# Altium PCB PCB.PcbDoc (part 1 of 2)
Units mil, origin at the board's own origin, x right, y up, seen from the top; angles counter-clockwise.
Board outline 6000 x 4000 mil, 2 copper layers (Top Layer, Bottom Layer); 149 components, 246 nets, 514 pads, 0 vias.
Unrouted connection lines stored in the file: 218.
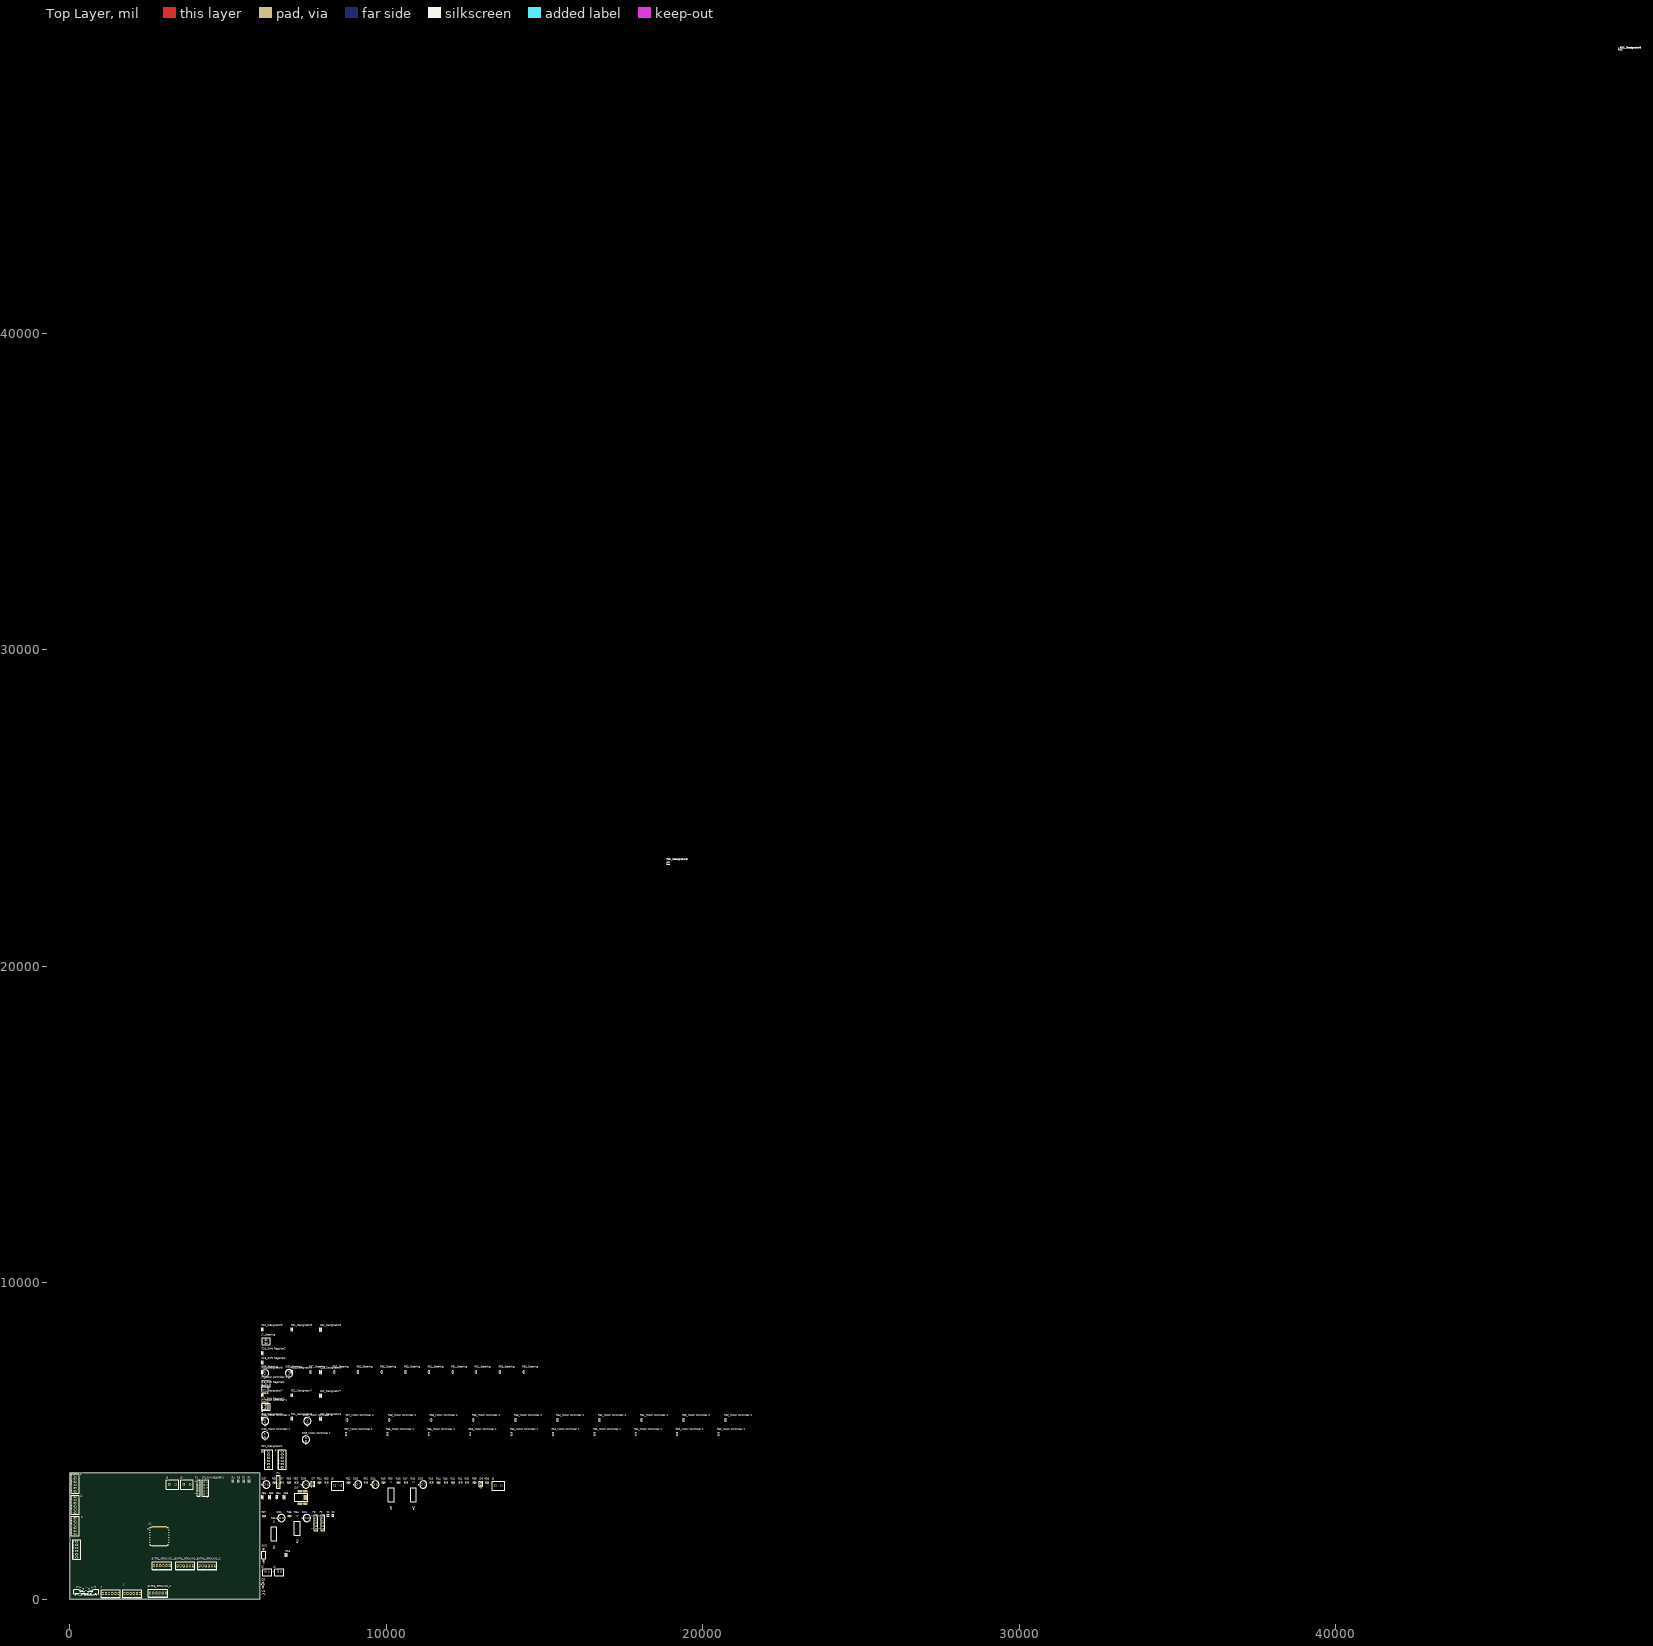
[diagram p0: Top Layer view]
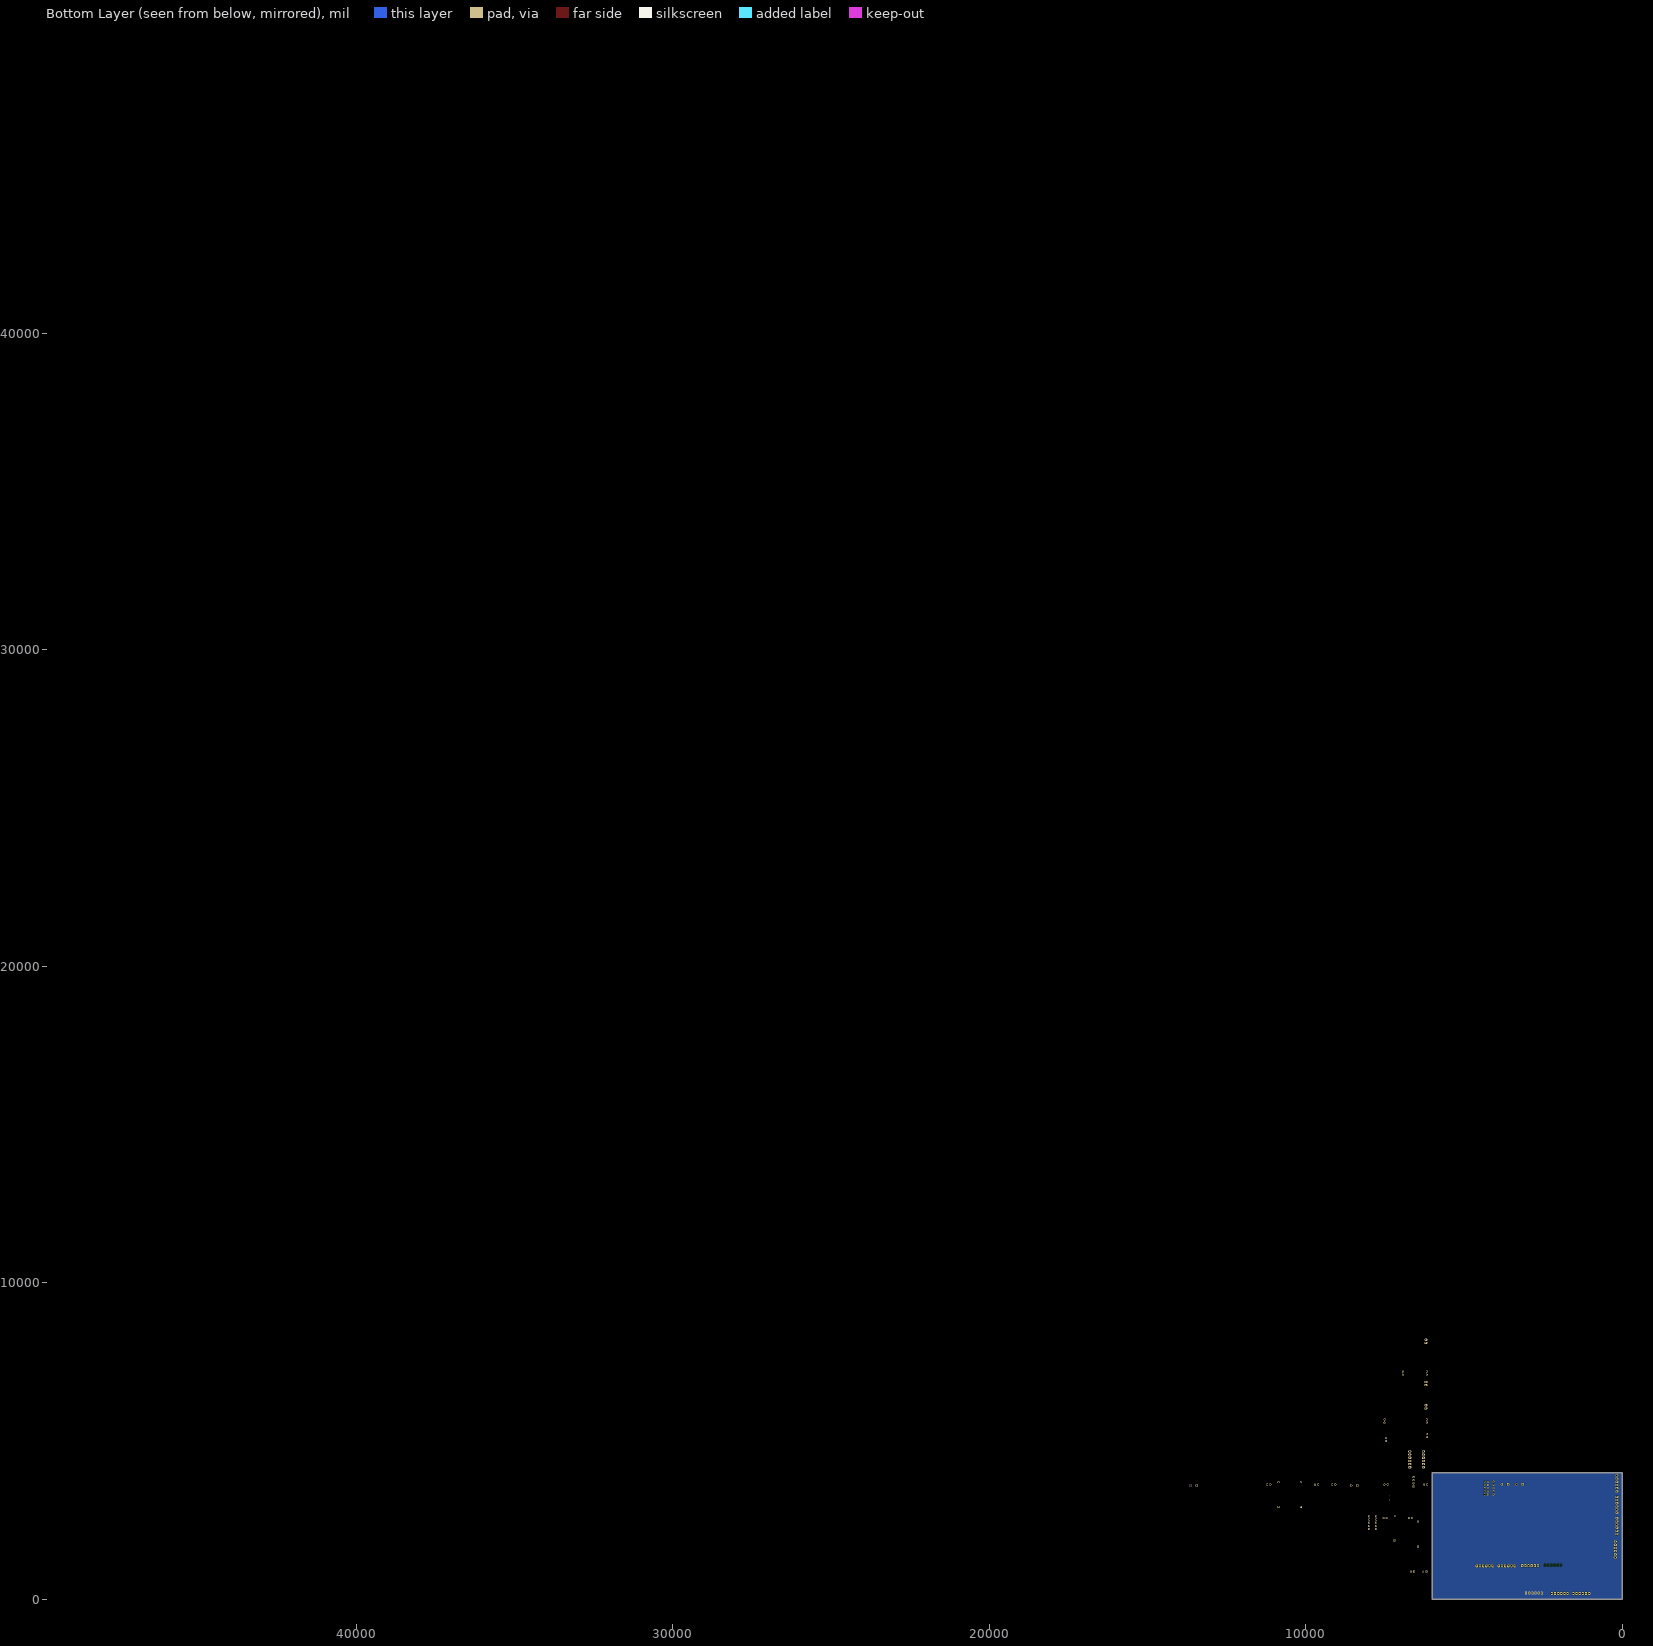
[diagram p1: Bottom Layer view, seen from below]

## Layer stack, top to bottom
Top Solder: solder mask 0.4, Solder Resist, Dk 3.5
Top Layer: signal copper 1.4
Dielectric 1: dielectric 12.6, FR-4, Dk 4.8
Bottom Layer: signal copper 1.4
Bottom Solder: solder mask 0.4, Solder Resist, Dk 3.5

## Board outline
0,0 6000,0 6000,4000 0,4000

## Design rules (kind name [scope] priority, off if disabled: settings)
BoardOutlineClearance [All] p1: gap=7.87 ignorepadtopadclearanceinfootprint=FALSE
Clearance [All] p1: gap=5 ignorepadtopadclearanceinfootprint=FALSE except(9.84: Arc-Hole Track-Hole SMDPad-Hole THPad-Hole Via-Hole Fill-Hole Poly-Hole Region-Hole Text-Hole)
ComponentClearance [All] p1: gap=5 collisioncheckmode=3 verticalgap=5 showdistances=TRUE
DiffPairsRouting [All] p1: maxlimit=10 minlimit=5 mostfreqgap=5 toplayer_minwidth=5 toplayer_maxwidth=1000 toplayer_prefwidth=5 bottomlayer_minwidth=5 bottomlayer_maxwidth=1000 bottomlayer_prefwidth=5 maxuncoupledlength=500
Height [All] p1: minheight=0 maxheight=71497.94 prefheight=500
HoleSize [All] p1: absolutevalues=TRUE maxlimit=248.03 minlimit=11.81 maxpercent=80.000 minpercent=20.000
HoleToHoleClearance [All] p1: gap=9.84 allowstackedmicrovias=FALSE
MinimumAnnularRing [All] p1: minimumring=3
MinimumSolderMaskSliver [All] p1: minsoldermaskwidth=0
PlaneClearance [All] p1: clearance=5
PlaneConnect PlaneConnectPowerPads [InPadClass('PowerPads')] p1: planeconnectstyle=Direct reliefexpansion=20 reliefentries=4 reliefconductorwidth=10 reliefairgap=10
PlaneConnect [All] p2: pad.planeconnectstyle=Relief pad.reliefexpansion=11.81 pad.reliefentries=4 pad.reliefconductorwidth=5 pad.reliefairgap=5 via.planeconnectstyle=Direct via.reliefexpansion=11.81 via.reliefentries=4 via.reliefconductorwidth=5 via.reliefairgap=5
PolygonConnect PolygonConnectPowerPads [All vs (InPadClass('PowerPads'))] p1: connectstyle=Direct reliefconductorwidth=10 reliefentries=4 polygonreliefangle="90 Angle" airgapwidth=10
PolygonConnect [All] p2: thpad.connectstyle=Relief thpad.reliefconductorwidth=5 thpad.reliefentries=4 thpad.polygonreliefangle="90 Angle" thpad.airgapwidth=5 smdpad.connectstyle=Relief smdpad.reliefconductorwidth=5 smdpad.reliefentries=4 smdpad.polygonreliefangle="90 Angle" smdpad.airgapwidth=5 via.connectstyle=Direct via.reliefconductorwidth=5 via.reliefentries=4 via.polygonreliefangle="90 Angle" via.airgapwidth=5
RoomDefinition TOP [InComponentClass('TOP')] p1: confinementstyle=ConfineIn formatcopy=TRUE lockcomponents=FALSE outline -1000,-1000 1000,-1000 1000,0 -1000,0
RoutingVias [All] p1: holewidth=11.81 width=23.62 viastyle="Through Hole" minholewidth=11.81 minwidth=23.62 maxholewidth=23.62 maxwidth=259.84
SilkToSilkClearance [All] p1: silktosilkclearance=0
SilkToSolderMaskClearance [IsPad] p1: minsilkscreentomaskgap=5 clearancetoexposedcopper=TRUE
SolderMaskExpansion [All] p1: expansion=2.95 istentingtop=FALSE
Width [All] p1: maxlimit=1000 minlimit=5 preferedwidth=5 minimp=50.000000 maximp=50.000000 favimp=50.000000
20 further rules are at their usual default settings.

## Classes and differential pairs
component class CONNECTORS: J10 L2 P4 R69 R70
channel class Single_12V: "Motor Controller 1" "Motor Controller 2" Steering
channel class shiftRegister: "Shift Register1" "Shift Register2"
channel class CAN: CAN1 CAN2
channel class 12V_LS: Designator1 Designator2 Designator3 Designator4 Designator5 Designator6 Designator7 Designator8 Designator9
channel class 12_TO_3V3_VOLTAGE_DIVIDER: 1 2 3 4 5 6
channel class 5V_TO_3V_VD: Designator1 Designator2 Designator3 Designator4 Designator5 Designator6
channel class 5V_LS: 5VLS1 5VLS2 5VLS3 5VLS4 5VLS5 5VLS6
component class TOP: EXTRA_GROUND_1 EXTRA_GROUND_2 EXTRA_GROUND_3 EXTRA_GROUND_4 J8 J9 P1 R1 R2 R3 R4 STLINK-HEADER-1
component class Steering: DS8_Steering DS9_Steering J7_Steering R59_Steering R60_Steering R61_Steering R62_Steering R63_Steering R64_Steering R65_Steering R66_Steering R67_Steering R68_Steering
component class "Shift Register2": "C18_Shift Register2" "U3_Shift Register2"
component class "Shift Register1": "C18_Shift Register1" "U3_Shift Register1"
component class POWER: C14 C15 C16 C17 D3 D4 D6 D7 DS3 DS4 DS5 DS6 DS7 J5 J6 R16 R17 R38 R39 R40 R41 R42 R43 R44 R45 R46 R47 R48 R49 R50 R51 R52 R53 R54 R55 R56 R57 R58 VR1
component class "Motor Controller 2": "DS8_Motor Controller 2" "DS9_Motor Controller 2" "J7_Motor Controller 2" "R59_Motor Controller 2" "R60_Motor Controller 2" "R61_Motor Controller 2" "R62_Motor Controller 2" "R63_Motor Controller 2" "R64_Motor Controller 2" "R65_Motor Controller 2" "R66_Motor Controller 2" "R67_Motor Controller 2" "R68_Motor Controller 2"
component class "Motor Controller 1": "DS8_Motor Controller 1" "DS9_Motor Controller 1" "J7_Motor Controller 1" "R59_Motor Controller 1" "R60_Motor Controller 1" "R61_Motor Controller 1" "R62_Motor Controller 1" "R63_Motor Controller 1" "R64_Motor Controller 1" "R65_Motor Controller 1" "R66_Motor Controller 1" "R67_Motor Controller 1" "R68_Motor Controller 1"
component class Microcontroller: 5 6 C1 C2 C3 C4 C5 C41 C42 C43 C44 C45 C46 C47 C48 C49 C50 DS1 DS2 P2 P3 R5 R34 R35 R36 R37 S1 U1 Y1
component class MCU: C6 C7 C8 C9 C10 C11 C12 C13 D1 D2 R6 R7 R8 R9 R10 R11 R12 R13 R14 R15 SW1 U2 Y2
component class LDO: C35 C36 C37 C38 VR2
component class Designator9: C21_Designator9 C22_Designator9 C23_Designator9 IC2_Designator9 R21_Designator9 R22_Designator9
component class Designator8: C21_Designator8 C22_Designator8 C23_Designator8 IC2_Designator8 R21_Designator8 R22_Designator8
component class Designator7: C21_Designator7 C22_Designator7 C23_Designator7 IC2_Designator7 R21_Designator7 R22_Designator7
component class Designator6: C21_Designator6 C22_Designator6 C23_Designator6 IC2_Designator6 R21_Designator6 R22_Designator6
component class Designator5: C21_Designator5 C22_Designator5 C23_Designator5 IC2_Designator5 R21_Designator5 R22_Designator5
component class Designator4: C21_Designator4 C22_Designator4 C23_Designator4 IC2_Designator4 R21_Designator4 R22_Designator4
component class Designator3: C21_Designator3 C22_Designator3 C23_Designator3 IC2_Designator3 R21_Designator3 R22_Designator3
component class Designator2: C21_Designator2 C22_Designator2 C23_Designator2 IC2_Designator2 R21_Designator2 R22_Designator2
component class Designator1: C21_Designator1 C22_Designator1 C23_Designator1 IC2_Designator1 R21_Designator1 R22_Designator1
component class "CAN Connectors": J3 J4
component class CAN2: C39_CAN2 C40_CAN2 IC3_CAN2 R28_CAN2 S2_CAN2
component class CAN1: C39_CAN1 C40_CAN1 IC3_CAN1 R28_CAN1 S2_CAN1
component class Buck: C24 C25 C26 C27 C28 C29 C30 C31 C32 C33 C34 D5 L1 R23 R24 R25 R26 R27 U4
component class "Accelerometer And Gyro": C53 C54 C55 C56 U5
component class "12V Power And Ground": 2 J2
component class "12 Volt Signal Bulkhead": 3
component class 6: C52_6 R32_6 R33_6
component class "5V Power And Ground": 1 J1 R18
component class "5 Volt Signal Bulkhead": 4
component class 5VLS6: C19_5VLS6 C20_5VLS6 IC1_5VLS6 R19_5VLS6 R20_5VLS6
component class 5VLS5: C19_5VLS5 C20_5VLS5 IC1_5VLS5 R19_5VLS5 R20_5VLS5
component class 5VLS4: C19_5VLS4 C20_5VLS4 IC1_5VLS4 R19_5VLS4 R20_5VLS4
component class 5VLS3: C19_5VLS3 C20_5VLS3 IC1_5VLS3 R19_5VLS3 R20_5VLS3
component class 5VLS2: C19_5VLS2 C20_5VLS2 IC1_5VLS2 R19_5VLS2 R20_5VLS2
component class 5VLS1: C19_5VLS1 C20_5VLS1 IC1_5VLS1 R19_5VLS1 R20_5VLS1
component class 5: C52_5 R32_5 R33_5
component class 4: C52_4 R32_4 R33_4
component class 3: C52_3 R32_3 R33_3
component class 2: C52_2 R32_2 R33_2
component class 1: C52_1 R32_1 R33_1
differential pair USB_D: +USB_D_P -USB_D_N

## Components (designator, comment, footprint, x,y, rotation, side; value= is the part's Value field where it differs from the comment)
1 "282834-6" "TE 282834-6" 1970,180 r180 top
2 "282834-6" "TE 282834-6" 1290,180 r180 top
3 "282834-6" "TE 282834-6" 165,2310 r90 top
4 "282834-6" "TE 282834-6" 215,1570 r90 top
5 "282834-6" "TE 282834-6" 6710,4420 r90 top
6 "282834-6" "TE 282834-6" 6280,4420 r90 top
C1 "GRM188R71A225KE15D" FP-GRM188-0_1-e0_2_0_5-MFG 8155,2650 r0 top
C2 "GRM188R71A225KE15D" FP-GRM188-0_1-e0_2_0_5-MFG 8305,2650 r0 top
"C18_Shift Register1" "0.1 µF" "CAP 0603_1608" 6085,7475 r90 top (schematic designator C18)
"C18_Shift Register2" "0.1 µF" "CAP 0603_1608" 6085,7775 r90 top (schematic designator C18)
C22_Designator1 "0.22 µF" "CAP 0603_1608" 48999.5,48999.5 r0 top (schematic designator C22)
C22_Designator2 "0.22 µF" "CAP 0603_1608" 48999.5,48999.5 r0 top (schematic designator C22)
C22_Designator3 "0.22 µF" "CAP 0603_1608" 7930,5705 r90 top (schematic designator C22)
C22_Designator4 "0.22 µF" "CAP 0603_1608" 48999.5,48999.5 r0 top (schematic designator C22)
C22_Designator5 "0.22 µF" "CAP 0603_1608" 48999.5,48999.5 r0 top (schematic designator C22)
C22_Designator6 "0.22 µF" "CAP 0603_1608" 48999.5,48999.5 r0 top (schematic designator C22)
C22_Designator7 "0.22 µF" "CAP 0603_1608" 7930,6440 r90 top (schematic designator C22)
C22_Designator8 "0.22 µF" "CAP 0603_1608" 7930,7175 r90 top (schematic designator C22)
C22_Designator9 "0.22 µF" "CAP 0603_1608" 7930,8520 r90 top (schematic designator C22)
C53 "0.1 µF" "CAP 0603_1608" 6775,3225 r90 top
C54 "10000 pF" "CAP 0603_1608" 6545,3225 r90 top
C55 "0.1 µF" "CAP 0603_1608" 6085,3225 r90 top
C56 "2.2 µF" "CAP 0603_1608" 6315,3225 r90 top
D5 "SS14FL" FP-425AD-MFG 6100,470 r90 top value=60pF
D6 "SMAJ14A-E3/61" VISH-DO-214AC-2_L 12995,3640 r90 top
D7 "SMAJ14A-E3/61" VISH-DO-214AC-2_L 7690,3640 r90 top
DS1 "HLMP-4740" AVAG-HLMP-4740 7490,2565 r0 top
DS2 "HLMP-4740" AVAG-HLMP-4740 6685,2565 r0 top
DS3 "HLMP-4740" AVAG-HLMP-4740 11165,3625 r0 top
DS4 "HLMP-4740" AVAG-HLMP-4740 9655,3625 r0 top
DS5 "HLMP-4740" AVAG-HLMP-4740 9110,3625 r0 top
DS6 "HLMP-4740" AVAG-HLMP-4740 7460,3625 r0 top
DS7 "HLMP-4740" AVAG-HLMP-4740 6210,3625 r0 top
"DS8_Motor Controller 1" "HLMP-4740" AVAG-HLMP-4740 6170,5180 r90 top (schematic designator DS8)
"DS8_Motor Controller 2" "HLMP-4740" AVAG-HLMP-4740 6170,5630 r90 top (schematic designator DS8)
DS8_Steering "HLMP-4740" AVAG-HLMP-4740 6170,7145 r90 top (schematic designator DS8)
"DS9_Motor Controller 1" "HLMP-4740" AVAG-HLMP-4740 7460,5050 r90 top (schematic designator DS9)
"DS9_Motor Controller 2" "HLMP-4740" AVAG-HLMP-4740 7505,5630 r90 top (schematic designator DS9)
DS9_Steering "HLMP-4740" AVAG-HLMP-4740 6925,7145 r90 top (schematic designator DS9)
EXTRA_GROUND_1 "282834-6" "TE 282834-6" 3646.46,1055 r180 top
EXTRA_GROUND_2 "282834-6" "TE 282834-6" 2785,195 r180 top
EXTRA_GROUND_3 "282834-6" "TE 282834-6" 4341.46,1055 r180 top
EXTRA_GROUND_4 "282834-6" "TE 282834-6" 2906.46,1060 r180 top
J1 "282834-6" "TE 282834-6" 165,3660 r90 top
J2 "282834-6" "TE 282834-6" 165,2985 r90 top
J3 "B2B-XH-A(LF)(SN)" FP-B2B-XH-A_LF_SN-MFG 6235,850 r0 top
J4 "B2B-XH-A(LF)(SN)" FP-B2B-XH-A_LF_SN-MFG 6620,850 r0 top
J5 "691137710002" 691137710002 13540,3585 r0 top
J6 "691137710002" 691137710002 8465,3585 r0 top
"J7_Motor Controller 1" "282834-2" "TE 282834-2" 6200,6080 r90 top (schematic designator J7)
"J7_Motor Controller 2" "282834-2" "TE 282834-2" 6200,6815 r90 top (schematic designator J7)
J7_Steering "282834-2" "TE 282834-2" 6200,8150 r90 top (schematic designator J7)
J8 "691137710002" 691137710002 3700,3620 r0 top
J9 "691137710002" 691137710002 3240,3620 r0 top
J10 "67503-1020" MOLX-67503-1020_V 7436.53,3279.61 r0 top
P1 "61300511121" 61300511121 4070,3515 r90 top
P2 "61300511121" 61300511121 7995,2420 r90 top
P3 "61300511121" 61300511121 7775,2420 r90 top
P4 "61300411121" 61300411121 6590,3710 r90 top
R1 "RMCF0603ZT0R00" FP-RMCF0603-MFG 5660,3740 r0 top value=0mΩ
R2 "RMCF0603ZT0R00" FP-RMCF0603-MFG 5490,3740 r0 top value=0mΩ
R3 "RMCF0603ZT0R00" FP-RMCF0603-MFG 5320,3740 r0 top value=0mΩ
R4 "RMCF0603ZT0R00" FP-RMCF0603-MFG 5150,3740 r0 top value=0mΩ
R18 "100 kOhms" "RES 0603_1608" 6840,1400 r90 top
R21_Designator1 "100 kOhms" "RES 0603_1608" 48999.5,48999.5 r0 top (schematic designator R21)
R21_Designator2 "100 kOhms" "RES 0603_1608" 48999.5,48999.5 r0 top (schematic designator R21)
R21_Designator3 "100 kOhms" "RES 0603_1608" 7015,5710 r90 top (schematic designator R21)
R21_Designator4 "100 kOhms" "RES 0603_1608" 48999.5,48999.5 r0 top (schematic designator R21)
R21_Designator5 "100 kOhms" "RES 0603_1608" 48999.5,48999.5 r0 top (schematic designator R21)
R21_Designator6 "100 kOhms" "RES 0603_1608" 48999.5,48999.5 r0 top (schematic designator R21)
R21_Designator7 "100 kOhms" "RES 0603_1608" 7015,6445 r90 top (schematic designator R21)
R21_Designator8 "100 kOhms" "RES 0603_1608" 7015,7180 r90 top (schematic designator R21)
R21_Designator9 "100 kOhms" "RES 0603_1608" 7015,8525 r90 top (schematic designator R21)
R22_Designator1 "10 kOhms" "RES 0603_1608" 48999.5,48999.5 r0 top (schematic designator R22)
R22_Designator2 "10 kOhms" "RES 0603_1608" 48999.5,48999.5 r0 top (schematic designator R22)
R22_Designator3 "10 kOhms" "RES 0603_1608" 6085,5710 r90 top (schematic designator R22)
R22_Designator4 "10 kOhms" "RES 0603_1608" 48999.5,48999.5 r0 top (schematic designator R22)
R22_Designator5 "10 kOhms" "RES 0603_1608" 48999.5,48999.5 r0 top (schematic designator R22)
R22_Designator6 "10 kOhms" "RES 0603_1608" 48999.5,48999.5 r0 top (schematic designator R22)
R22_Designator7 "10 kOhms" "RES 0603_1608" 6085,6445 r90 top (schematic designator R22)
R22_Designator8 "10 kOhms" "RES 0603_1608" 6085,7180 r90 top (schematic designator R22)
R22_Designator9 "10 kOhms" "RES 0603_1608" 6085,8525 r90 top (schematic designator R22)
R31_Designator1 "RMCF0603FT150K" FP-RMCF0603-IPC_B 6090,4690 r90 top (schematic designator R31)
R31_Designator2 "RMCF0603FT150K" FP-RMCF0603-IPC_B 18907.6,23270 r0 top (schematic designator R31)
R31_Designator3 "RMCF0603FT150K" FP-RMCF0603-IPC_B 18907.6,23270 r0 top (schematic designator R31)
R31_Designator4 "RMCF0603FT150K" FP-RMCF0603-IPC_B 18907.6,23270 r0 top (schematic designator R31)
R31_Designator5 "RMCF0603FT150K" FP-RMCF0603-IPC_B 18907.6,23270 r0 top (schematic designator R31)
R31_Designator6 "RMCF0603FT150K" FP-RMCF0603-IPC_B 18907.6,23270 r0 top (schematic designator R31)
R34 "AC01000005000JA100" RES_AC01_VIS 7185,1860 r90 top
R35 "RC0805FR-071KL" RESC2013X60X35ML10T20 6940,2630 r0 top
R36 "AC01000005000JA100" RES_AC01_VIS 6450,1673 r90 top
R37 "RC0805FR-071KL" RESC2013X60X35ML10T20 6135,2630 r0 top
R38 "RC0805FR-071KL" RESC2013X60X35ML10T20 13185,3690 r0 top
R39 "RC0805FR-071KL" RESC2013X60X35ML10T20 12785,3690 r0 top
R40 "RC0805FR-071KL" RESC2013X60X35ML10T20 12555,3690 r0 top
R41 "RC0805FR-071KL" RESC2013X60X35ML10T20 12340,3690 r0 top
R42 "RC0805FR-071KL" RESC2013X60X35ML10T20 12110,3690 r0 top
R43 "RC0805FR-071KL" RESC2013X60X35ML10T20 11420,3690 r0 top
R44 "RC0805FR-071KL" RESC2013X60X35ML10T20 11650,3690 r0 top
R45 "RC0805FR-071KL" RESC2013X60X35ML10T20 11880,3690 r0 top
R46 "RC0805FR-071KL" RESC2013X60X35ML10T20 10385,3690 r0 top
R47 "RC0805FR-071KL" RESC2013X60X35ML10T20 10615,3690 r0 top
R48 "AC01000005000JA100" RES_AC01_VIS 10860,2920 r90 top
R49 "RC0805FR-071KL" RESC2013X60X35ML10T20 9910,3690 r0 top
R50 "AC01000005000JA100" RES_AC01_VIS 10155,2920 r90 top
R51 "RC0805FR-071KL" RESC2013X60X35ML10T20 9365,3690 r0 top
R52 "RC0805FR-071KL" RESC2013X60X35ML10T20 8805,3690 r0 top
R53 "RC0805FR-071KL" RESC2013X60X35ML10T20 8115,3690 r0 top
R54 "RC0805FR-071KL" RESC2013X60X35ML10T20 7885,3690 r0 top
R55 "RC0805FR-071KL" RESC2013X60X35ML10T20 7155,3690 r0 top
R56 "RC0805FR-071KL" RESC2013X60X35ML10T20 6925,3690 r0 top
R57 "RC0805FR-071KL" RESC2013X60X35ML10T20 6695,3690 r0 top
R58 "RC0805FR-071KL" RESC2013X60X35ML10T20 6465,3690 r0 top
"R59_Motor Controller 1" "RC0805FR-071KL" RESC2013X60X35ML10T20 19190,5215 r90 top (schematic designator R59)
"R59_Motor Controller 2" "RC0805FR-071KL" RESC2013X60X35ML10T20 19390,5665 r90 top (schematic designator R59)
R59_Steering "RC0805FR-071KL" RESC2013X60X35ML10T20 13590,7180 r90 top (schematic designator R59)
"R60_Motor Controller 1" "RC0805FR-071KL" RESC2013X60X35ML10T20 20500,5215 r90 top (schematic designator R60)
"R60_Motor Controller 2" "RC0805FR-071KL" RESC2013X60X35ML10T20 20720,5665 r90 top (schematic designator R60)
R60_Steering "RC0805FR-071KL" RESC2013X60X35ML10T20 14340,7180 r90 top (schematic designator R60)
"R61_Motor Controller 1" "RC0805FR-071KL" RESC2013X60X35ML10T20 16580,5215 r90 top (schematic designator R61)
"R61_Motor Controller 2" "RC0805FR-071KL" RESC2013X60X35ML10T20 16740,5665 r90 top (schematic designator R61)
R61_Steering "RC0805FR-071KL" RESC2013X60X35ML10T20 12100,7180 r90 top (schematic designator R61)
"R62_Motor Controller 1" "RC0805FR-071KL" RESC2013X60X35ML10T20 17880,5215 r90 top (schematic designator R62)
"R62_Motor Controller 2" "RC0805FR-071KL" RESC2013X60X35ML10T20 18060,5665 r90 top (schematic designator R62)
R62_Steering "RC0805FR-071KL" RESC2013X60X35ML10T20 12840,7180 r90 top (schematic designator R62)
"R63_Motor Controller 1" "RC0805FR-071KL" RESC2013X60X35ML10T20 13960,5215 r90 top (schematic designator R63)
"R63_Motor Controller 2" "RC0805FR-071KL" RESC2013X60X35ML10T20 14080,5665 r90 top (schematic designator R63)
R63_Steering "RC0805FR-071KL" RESC2013X60X35ML10T20 10605,7180 r90 top (schematic designator R63)
"R64_Motor Controller 1" "RC0805FR-071KL" RESC2013X60X35ML10T20 15270,5215 r90 top (schematic designator R64)
"R64_Motor Controller 2" "RC0805FR-071KL" RESC2013X60X35ML10T20 15410,5665 r90 top (schematic designator R64)
R64_Steering "RC0805FR-071KL" RESC2013X60X35ML10T20 11350,7180 r90 top (schematic designator R64)
"R65_Motor Controller 1" "RC0805FR-071KL" RESC2013X60X35ML10T20 11340,5215 r90 top (schematic designator R65)
"R65_Motor Controller 2" "RC0805FR-071KL" RESC2013X60X35ML10T20 11420,5665 r90 top (schematic designator R65)
R65_Steering "RC0805FR-071KL" RESC2013X60X35ML10T20 9105,7180 r90 top (schematic designator R65)
"R66_Motor Controller 1" "RC0805FR-071KL" RESC2013X60X35ML10T20 12650,5215 r90 top (schematic designator R66)
"R66_Motor Controller 2" "RC0805FR-071KL" RESC2013X60X35ML10T20 12750,5665 r90 top (schematic designator R66)
R66_Steering "RC0805FR-071KL" RESC2013X60X35ML10T20 9855,7180 r90 top (schematic designator R66)
"R67_Motor Controller 1" "RC0805FR-071KL" RESC2013X60X35ML10T20 8725,5215 r90 top (schematic designator R67)
"R67_Motor Controller 2" "RC0805FR-071KL" RESC2013X60X35ML10T20 8765,5665 r90 top (schematic designator R67)
R67_Steering "RC0805FR-071KL" RESC2013X60X35ML10T20 7605,7180 r90 top (schematic designator R67)
"R68_Motor Controller 1" "RC0805FR-071KL" RESC2013X60X35ML10T20 10035,5215 r90 top (schematic designator R68)
"R68_Motor Controller 2" "RC0805FR-071KL" RESC2013X60X35ML10T20 10095,5665 r90 top (schematic designator R68)
R68_Steering "RC0805FR-071KL" RESC2013X60X35ML10T20 8355,7180 r90 top (schematic designator R68)
STLINK-HEADER-1 "826925-5" FP-826925-5-MFG 4290,3510 r90 top
SW1 "FSMSM" TECO-FSMSM-2_V 6125,1395 r90 top
U1 "STM32F446VET6" FP-LQFP100-1L-MFG 2825,1990 r0 top
"U3_Shift Register1" "74HC595PW,118" FP-SOT403-1-MFG 6170,6100 r90 top (schematic designator U3)
"U3_Shift Register2" "74HC595PW,118" FP-SOT403-1-MFG 6170,6630 r90 top (schematic designator U3)
U5 "ICM-20602" INSE-I62-16 6115,130 r0 top

## Footprints (in the part's own frame and the unit in brackets; to place one, negate y for a bottom-side part, rotate by r counter-clockwise, add the part's x,y. Pads: shape width x height; smd on the part's side, far side on the other; paste and mask are expansions set on the pad)
61300411121 [mm] "Pin Header, pitch 2.54 mm, THT, Vertical, single row, 4p"
  rect 1.6x1.6 hole 1.1: 1(-3.81,0)
  round 1.6 hole 1.1: 2(-1.27,0) 3(1.27,0) 4(3.81,0)
  silkscreen extent -5.23,-1.35 5.23,1.35, body extent -5.08,-1.27 5.08,1.27, height 8.57
61300511121 [mm] "Pin Header, pitch 2.54 mm, THT, Vertical, single row, 5p"
  rrect50% 1.6x1.6 hole 1.1: 1(-5.08,0)
  round 1.6 hole 1.1: 2(-2.54,0) 3(0,0) 4(2.54,0) 5(5.08,0)
  silkscreen extent -6.5,-1.35 6.5,1.35, body extent -6.35,-1.27 6.35,1.27, height 8.57
691137710002 [mm] "Horizontal Cable Entry with Pressure Clamp, pitch 5mm, 02p"
  rrect50% 1.95x1.95 hole 1.3: 1(-2.5,0.25)
  round 1.95 hole 1.3: 2(2.5,0.25)
  silkscreen extent -5,-3.75 5,3.75, body extent -5,-3.75 5,3.75, height 11.6
AVAG-HLMP-4740 [mm] "THD, 2-Leads, Dia 5.845mm, Pitch 2.54mm"
  round 1.55 hole 1.05: 1(-1.27,0) 2(1.27,0)
  silkscreen extent -3.92,-2.92 2.92,2.92
"CAP 0603_1608" [mm] "Chip Capacitor, 2-Leads, Body 1.60x0.80mm, IPC Medium Density"
  rect 0.9x1 smd: 1(-0.675,0) 2(0.675,0)
  silkscreen extent -1.4,-0.7 1.4,0.7, body extent -0.8,-0.41 0.8,0.41, height 0.82
FP-425AD-MFG [mm]
  rect 1.34x1.8 smd paste+0 mask+0: 1(-1.43,0) 2(1.43,0)
  silkscreen extent -2.8,-0.97 0.39,0.97, body extent -2.2,-1.07 2.2,1.07, height 0.25
FP-826925-5-MFG [mm]
  rect 1.55x1.55 hole 1 paste-1000 mask+0: 1(-5.08,-1.27)
  round 1.55 hole 1 paste-1000 mask+0: 2(-5.08,1.27) 3(-2.54,-1.27) 4(-2.54,1.27) 5(0,-1.27) 6(0,1.27) 7(2.54,-1.27) 8(2.54,1.27) 9(5.08,-1.27) 10(5.08,1.27)
  silkscreen extent -7.32,-2.6 6.6,2.6, body extent -6.7,-2.7 6.7,2.7, height 0.25
FP-B2B-XH-A_LF_SN-MFG [mm]
  rect 1.55x1.55 hole 1 paste-1000 mask+0: 1(-1.25,0.525)
  round 1.55 hole 1 paste-1000 mask+0: 2(1.25,0.525)
  silkscreen extent -4.5,-2.88 3.7,2.88, body extent -3.8,-2.98 3.8,2.98, height 0.25
FP-GRM188-0_1-e0_2_0_5-MFG [mm]
  rect 0.65x0.7 smd paste+0 mask+0: 1(-0.675,0) 2(0.675,0)
  silkscreen extent -0.85,-0.75 0.85,0.75, body extent -1.1,-0.55 1.1,0.55, height 0.25
FP-LQFP100-1L-MFG [mm]
  rect 1.2x0.3 smd paste+0 mask+0: 1(-7.75,6) 2(-7.75,5.5) 3(-7.75,5) 4(-7.75,4.5) 5(-7.75,4) 6(-7.75,3.5) 7(-7.75,3) 8(-7.75,2.5) 9(-7.75,2) 10(-7.75,1.5) 11(-7.75,1) 12(-7.75,0.5) 13(-7.75,0) 14(-7.75,-0.5) 15(-7.75,-1) 16(-7.75,-1.5) 17(-7.75,-2) 18(-7.75,-2.5) 19(-7.75,-3) 20(-7.75,-3.5) 21(-7.75,-4) 22(-7.75,-4.5) 23(-7.75,-5) 24(-7.75,-5.5) 25(-7.75,-6) 51(7.75,-6) 52(7.75,-5.5) 53(7.75,-5) 54(7.75,-4.5) 55(7.75,-4) 56(7.75,-3.5) 57(7.75,-3) 58(7.75,-2.5) 59(7.75,-2) 60(7.75,-1.5) 61(7.75,-1) 62(7.75,-0.5) 63(7.75,0) 64(7.75,0.5) 65(7.75,1) 66(7.75,1.5) 67(7.75,2) 68(7.75,2.5) 69(7.75,3) 70(7.75,3.5) 71(7.75,4) 72(7.75,4.5) 73(7.75,5) 74(7.75,5.5) 75(7.75,6)
  rect 0.3x1.2 smd paste+0 mask+0: 26(-6,-7.75) 27(-5.5,-7.75) 28(-5,-7.75) 29(-4.5,-7.75) 30(-4,-7.75) 31(-3.5,-7.75) 32(-3,-7.75) 33(-2.5,-7.75) 34(-2,-7.75) 35(-1.5,-7.75) 36(-1,-7.75) 37(-0.5,-7.75) 38(0,-7.75) 39(0.5,-7.75) 40(1,-7.75) 41(1.5,-7.75) 42(2,-7.75) 43(2.5,-7.75) 44(3,-7.75) 45(3.5,-7.75) 46(4,-7.75) 47(4.5,-7.75) 48(5,-7.75) 49(5.5,-7.75) 50(6,-7.75) 76(6,7.75) 77(5.5,7.75) 78(5,7.75) 79(4.5,7.75) 80(4,7.75) 81(3.5,7.75) 82(3,7.75) 83(2.5,7.75) 84(2,7.75) 85(1.5,7.75) 86(1,7.75) 87(0.5,7.75) 88(0,7.75) 89(-0.5,7.75) 90(-1,7.75) 91(-1.5,7.75) 92(-2,7.75) 93(-2.5,7.75) 94(-3,7.75) 95(-3.5,7.75) 96(-4,7.75) 97(-4.5,7.75) 98(-5,7.75) 99(-5.5,7.75) 100(-6,7.75)
  silkscreen extent -9.07,-7.1 7.1,7.1, body extent -8.45,-8.45 8.45,8.45, height 0.25
FP-RMCF0603-IPC_B [mil]
  rect 39.61x37.73 smd paste+0 mask+0: 1(-27.6,0) 2(27.6,0)
  silkscreen extent -47,-35 47,35, body extent -57,-29 57,29, height 10
FP-RMCF0603-MFG [mm]
  rect 0.65x0.9 smd paste+0 mask+0: 1(-0.725,0) 2(0.725,0)
  silkscreen extent -0.85,-0.85 0.85,0.85, body extent -1.15,-0.58 1.15,0.58, height 0.25
FP-SOT403-1-MFG [mm]
  rect 1.35x0.6 smd paste-1000 mask+0: 1(-2.925,2.375) 8(-2.925,-2.375) 9(2.925,-2.375) 16(2.925,2.375)
  rect 1.35x0.4 smd paste-1000 mask+0: 2(-2.925,1.625) 3(-2.925,0.975) 4(-2.925,0.325) 5(-2.925,-0.325) 6(-2.925,-0.975) 7(-2.925,-1.625) 10(2.925,-1.625) 11(2.925,-0.975) 12(2.925,-0.325) 13(2.925,0.325) 14(2.925,0.975) 15(2.925,1.625)
  silkscreen extent -4.32,-2.55 1.88,2.55, body extent -3.72,-2.9 3.72,2.9, height 0.25
INSE-I62-16 [mm] "LGA, 16-Leads, Body 3x3mm, Pitch 0.5mm"
  rect 0.35x0.25 smd: 1(-1.225,1) 2(-1.225,0.5) 3(-1.225,0) 4(-1.225,-0.5) 5(-1.225,-1) 9(1.225,-1) 10(1.225,-0.5) 11(1.225,0) 12(1.225,0.5) 13(1.225,1)
  rect 0.25x0.35 smd: 6(-0.5,-1.225) 7(0,-1.225) 8(0.5,-1.225) 14(0.5,1.225) 15(0,1.225) 16(-0.5,1.225)
  body extent -1.5,-1.5 1.5,1.5, height 0.8
MOLX-67503-1020_V [mm] "Mini USB Connector, SMT, Righer Angle"
  rrect50% 2.8x0.5 smd: 1(0,0) 2(0,-0.8) 3(0,-1.6) 4(0,-2.4) 5(0,-3.2)
  rrect50% 3.5x2.05 smd: 6(0.025,3.325) 8(0.025,-6.525)
  rrect50% 4x2.05 smd: 7(-4.225,3.325) 9(-4.225,-6.525)
  round 0.9 hole 0.9 unplated: X(-2.325,-3.8) Y(-2.325,0.6)
  silkscreen extent -8.25,-4.85 2,1.65, body extent -8.22,-6.56 0.78,3.34, height 3.95
"RES 0603_1608" [mm] "Chip Resistor, 2-Leads, Body 1.60x0.80mm, IPC Medium Density"
  rect 0.85x0.95 smd: 1(-0.65,0) 2(0.65,0)
  silkscreen extent -1.27,-0.7 1.27,0.7, body extent -0.8,-0.4 0.8,0.4, height 0.45
RES_AC01_VIS [mil]
  rect 63x63 / inner round 60 / far side rect 63x63 hole 43 paste-31.5 mask+0: 1(0,0)
  round 63 / inner round 60 / far side round 63 hole 43 paste-31.5 mask+0: 2(777,0)
  silkscreen extent -69,-89 610,90, body extent -16,-84 794,84, height 169
RESC2013X60X35ML10T20 [mm] "Chip Resistor, 2-Leads, Body 2.1x1.35mm, IPC Low Density"
  rect 1.2x1.45 smd: 1(-1,0) 2(1,0)
  silkscreen extent -0.1,-0.63 0.1,0.63, body extent -1.05,-0.68 1.05,0.67, height 0.6
"TE 282834-2" [mm]
  oval 1.75x2.5 hole 1.1: 1(-1.27,0) 2(1.27,0)
  silkscreen extent -2.7,-3.2 2.7,3.2, body extent -2.77,-3.25 2.77,3.25, height 10
"TE 282834-6" [mm]
  oval 1.75x2.5 hole 1.1: 1(-6.35,0) 2(-3.81,0) 3(-1.27,0) 4(1.27,0) 5(3.81,0) 6(6.35,0)
  silkscreen extent -7.78,-3.2 7.78,3.2, body extent -7.85,-3.25 7.85,3.25, height 10
TECO-FSMSM-2_V [mm] "SMD, 2-Leads, Body 6x3.5mm, Pitch 9.19mm"
  rect 2.2x1.6 smd: 1(-4.595,0)
  rect 2.18x1.6 smd: 2(4.595,0)
  silkscreen extent -6.37,-1.75 3,1.75, body extent -4.98,-1.75 4.98,1.75, height 4.4
VISH-DO-214AC-2_L [mm] "DO-214AC, 2-Leads, Body 4.5x2.79mm, IPC High Density"
  rect 2.05x1.45 smd: 1(-1.425,0) 2(1.425,0)
  silkscreen extent -3.12,-1.4 2.25,1.4, body extent -2.25,-1.4 2.25,1.4, height 2.29

## Part data
1 2 3 4 5 6 EXTRA_GROUND_1 EXTRA_GROUND_2 EXTRA_GROUND_3 EXTRA_GROUND_4 J1 J2: "TERM BLK 6P SIDE ENT 2.54MM PCB", Color=Green, Current=10A, Manufacturer="TE Connectivity AMP Connectors", Supplier Part Number 1=A98337-ND, Voltage=150V, ComponentLink1Description=Datasheet, ComponentLink1URL=https://www.te.com/commerce/DocumentDelivery/DDEController?Action=srchrtrv&DocNm=282834&DocType=Customer+Drawing&DocLang=English, ComponentLink2Description="DigiKey Link", ComponentLink2URL=http://digikey.com/product-detail/en/te-connectivity-amp-connectors/282834-6/A98337-ND/1153267, LastUpdated="2020-01-15 4:16:31 AM", Lifecycle Status=Active, Mating Orientation="Horizontal with Board", Minimum Order=1, Mounting Type="Through Hole", Number of Levels=1, Packaging=Bulk, Part Number=282834-6, Part Status=Active, Pitch="0.100\" (2.54mm)", Positions Per Level=6, Price=4.72, Series=Buchanan, Supplier 1=DigiKey, Wire Gauge="16-30 AWG", Wire Termination="Screw - Rising Cage Clamp"
C1 C2: library part CMP-2006-02836-2, "Chip Multilayer Ceramic Capacitors for General Purpose, 0603, 2.2uF, X7R, 15%, 10%, 10V", Capacitance=2.2uF, Case Code (Imperial)=0603, Case Code (Metric)=1608, Dielectric=X7R, Max Operating Temperature=125°C, Min Operating Temperature=-55°C, Package Quantity=1, Tolerance=10%, Voltage=10V, Case/Package=0603, Depth=0.8mm, Height=0.8mm, Lead Free="Lead Free", Length=1.6mm, Material=Ceramic, Mount="Surface Mount", Number of Pins=2, Packaging="Cut Tape", REACH SVHC="No SVHC", Termination=SMD/SMT, Thickness=0.035inch, Voltage Rating=10V, Voltage Rating (DC)=10V, Weight=7.1E-05oz, Width=0.031inch
"C18_Shift Register1" "C18_Shift Register2" C53 C55: library part C0603C104K5RAC7411, "CAP CER 0.1UF 50V X7R 0603", Device Package="0603 (1608 Metric)", Manufacturer=KEMET, Operating Temperature="-55°C ~ 125°C", Supplier Part Number 1=399-C0603C104K5RAC7411CT-ND, Temperature Coefficient=X7R, Tolerance=±10%, Voltage - Rated=50V, Applications="Bypass, Decoupling", Capacitance="0.1 µF", ComponentLink1Description=Datasheet, ComponentLink1URL=https://api.kemet.com/component-edge/download/datasheet/C0603C104K5RAC7411.pdf, ComponentLink2Description="DigiKey Link", ComponentLink2URL=https://www.digikey.com/en/products/detail/kemet/C0603C104K5RAC7411/3317013, Lifecycle Status=Active, Minimum Order=1, Mounting Type="Surface Mount, MLCC", Package / Case="0603 (1608 Metric)", Packaging=TapeAndReel, Part Number=C0603C104K5RAC7411, Part Status=Active, partid=2233, Price=0.01, Series="SMD Comm X7R", Size / Dimension="0.063\" L x 0.031\" W (1.60mm x 0.80mm)", Supplier 1=DigiKey, Thickness (Max)="0.035\" (0.90mm)"
  "C18_Shift Register1" "C18_Shift Register2": LastUpdated="2023-06-20 7:12:54 PM"
  C53 C55: LastUpdated="2023-06-07 7:13:18 PM"
C22_Designator1 C22_Designator2 C22_Designator3 C22_Designator4 C22_Designator5 C22_Designator6 C22_Designator7 C22_Designator8 C22_Designator9: library part CC0603KRX7R8BB224, "CAP CER 0.22UF 25V X7R 0603", Device Package="0603 (1608 Metric)", Manufacturer=Yageo, Operating Temperature="-55°C ~ 125°C", Supplier Part Number 1=311-1803-1-ND, Temperature Coefficient=X7R, Tolerance=±10%, Voltage - Rated=25V, Applications="General Purpose", Capacitance="0.22 µF", ComponentLink1Description=Datasheet, ComponentLink1URL=https://www.yageo.com/upload/media/product/productsearch/datasheet/mlcc/UPY-GPHC_X7R_6.3V-to-50V_18.pdf, ComponentLink2Description="DigiKey Link", ComponentLink2URL=https://www.digikey.com/en/products/detail/yageo/CC0603KRX7R8BB224/5195211, LastUpdated="2023-06-21 7:13:30 PM", Lifecycle Status=Active, Minimum Order=1, Mounting Type="Surface Mount, MLCC", Package / Case="0603 (1608 Metric)", Packaging=TapeAndReel, Part Number=CC0603KRX7R8BB224, Part Status=Active, partid=2214, Price=0.01, Series=CC, Size / Dimension="0.063\" L x 0.031\" W (1.60mm x 0.80mm)", Supplier 1=DigiKey, Thickness (Max)="0.035\" (0.90mm)"
C54: library part C0603C103K4RECAUTO, "CAP CER 0603 10NF 16V X7R 10%", Device Package="0603 (1608 Metric)", Manufacturer=KEMET, Operating Temperature="-55°C ~ 125°C", Ratings=AEC-Q200, Supplier Part Number 1=399-17880-1-ND, Temperature Coefficient=X7R, Tolerance=±10%, Voltage - Rated=16V, Applications="Automotive, ESD Protection", Capacitance="10000 pF", ComponentLink1Description=Datasheet, ComponentLink1URL=https://api.kemet.com/component-edge/download/datasheet/C0603C103K4RECAUTO.pdf, ComponentLink2Description="DigiKey Link", ComponentLink2URL=https://www.digikey.com/en/products/detail/kemet/C0603C103K4RECAUTO/8640474, LastUpdated="2023-06-07 7:13:03 PM", Lifecycle Status=Active, Minimum Order=1, Mounting Type="Surface Mount, MLCC", Package / Case="0603 (1608 Metric)", Packaging=TapeAndReel, Part Number=C0603C103K4RECAUTO, Part Status=Active, partid=8251, Price=0.01, Series="ESD SMD Auto X7R", Size / Dimension="0.063\" L x 0.031\" W (1.60mm x 0.80mm)", Supplier 1=DigiKey, Thickness (Max)="0.034\" (0.87mm)"
C56: library part CC0603ZRY5V6BB225, "CAP CER 2.2UF 10V Y5V 0603", Device Package="0603 (1608 Metric)", Manufacturer=Yageo, Operating Temperature="-30°C ~ 85°C", Supplier Part Number 1=311-1450-1-ND, Temperature Coefficient="Y5V (F)", Tolerance="-20%, +80%", Voltage - Rated=10V, Applications="General Purpose", Capacitance="2.2 µF", ComponentLink1Description=Datasheet, ComponentLink1URL=http://www.yageo.com/documents/recent/UPY-GPHC_Y5V_6.3V-to-50V_8.pdf, ComponentLink2Description="DigiKey Link", ComponentLink2URL=https://www.digikey.com/en/products/detail/yageo/CC0603ZRY5V6BB225/2833615, LastUpdated="2023-06-07 7:13:18 PM", Lifecycle Status=Active, Minimum Order=1, Mounting Type="Surface Mount, MLCC", Package / Case="0603 (1608 Metric)", Packaging=TapeAndReel, Part Number=CC0603ZRY5V6BB225, Part Status=Active, partid=2248, Price=0.01, Series=CC, Size / Dimension="0.063\" L x 0.031\" W (1.60mm x 0.80mm)", Supplier 1=DigiKey, Thickness (Max)="0.035\" (0.90mm)"
D5: library part CMP-07162-000013-1, "DIODE SCHOTTKY 40V 1A SOD123F", Capacitance=60pF, Forward Current=1A, Manufacturer="ON Semiconductor", Max Junction Temp=+125°C, Max Repetitive Reverse Voltage=40V, Max Surge Forward Current=40A, Package=425AD, Peak Reverse Current=30uA, Temperature="-55°C to +125°C", Temperature Range Low=-55°C, Automotive=No, Category=Diode, ComponentLink2Description=Datasheet, ComponentLink2URL=https://www.onsemi.com/pub/Collateral/SS14FL-D.PDF, Device Class L1="Discrete Semiconductors", Device Class L2=Diodes, Device Class L3="Schottky Diodes", Digikey Description="DIODE SCHOTTKY 40V 1A SOD123F", Height=1.08mm, Lead Free=Yes, Manufacturer Part Number=SS14FL, Mouser Description="SS14FL Series 40 V 1 A Surface Mount Schottky Barrier Rectifier - SOD-123F", Octopart=https://octopart.com/ss14fl-on+semiconductor-84331601, Reverse Voltage=40V, RoHS=TRUE, Temperature Range High=+125°C
D6 D7: library part CMP-0548-00224-2, "Transient Voltage Suppressor, 6.40 to 231 V, 14 V Stand-off Voltage, Uni-Directional, -55 to 155 degC, 2-pin DO-214AC, Pb-Free, Tape and Reel", Manufacturer="Vishay Semiconductor", Operating Junction and Storage Temperature Range="-55 to 150 degC", ComponentLink1Description="Manufacturer URL", ComponentLink1URL=http://www.vishay.com/, ComponentLink2Description=Datasheet, ComponentLink2URL=http://www.vishay.com/docs/88390/smaj50a.pdf, ComponentLink3Description="Package Specification", ComponentLink3URL=http://www.vishay.com/docs/88390/smaj50a.pdf, DatasheetVersion=12/8/2013, ID (uA)=1, IFSM="40 A", Mounting Technology="Surface Mount", PackageDescription="2-Pin DO-214AC (SMA), Body 4.245 x 2.665 mm", PackageReference=DO-214AC-2, Packing="Tape and Reel", PartNumber=SMAJ14A-E3/61, PPPM (W)="400, 300", RoHS=TRUE, VBR Uni-Directional (V)="6.4 to 231", VWM (V)=14
DS1 DS2 DS3 DS4 DS5 DS6 DS7 "DS8_Motor Controller 1" "DS8_Motor Controller 2" DS8_Steering "DS9_Motor Controller 1" "DS9_Motor Controller 2" DS9_Steering: library part CMP-2000-06413-1, "T-1 3/4 (5 mm) Low Current LED Lamp, Green, 1.9 V, -20 to 100 degC, 2-Pin THD, RoHS, Bulk", Color=Green, Dominant Wavelength/Color Temperature=569nm, Manufacturer=AvagoTechnologies, Package=2T-13/4, Package Description="2-Pin Through Hole Device, Dia 5.845 mm, Pitch 2.54 mm", Category=LEDs, Datasheet URL=http://docs.avagotech.com/docs/AV02-1557EN, Datasheet Version=07/2014, Intensity=2.3mcd, Lens Appearance=ColoredDiffused, Lens Shape Type=Circular, Manufacturer URL=http://www.avagotech.com/, Mounting=ThroughHole, Mounting Orientation=TopMount, Mounting Technology=ThroughHole, Number of LEDs=1, Package Reference=HLMP-4740, Packaging=Bulk, Peak Wavelength=565nm, Pin Count=2, Rad Hard=No, Type=Uni-Color, Viewing Angle=50°
J3 J4: library part CMP-2000-05888-3, "CONN HEADER VERT 2POS 2.5MM", Color=Natural, Contact Resistance=20mR, Current Rating=3A, Housing Color=White, Insulation Resistance=1GR, Max Operating Temperature=85°C, Max Voltage Rating (AC)=250V, Min Operating Temperature=-25°C, Connector Type="Male Pin", Contact Material=Brass, Contact Plating=Tin, Contact Type="Male Pin", Depth=5.75mm, Fastening Type=Detent, Housing Material=Polyamide, Lead Free="Lead Free", Lead Pitch=2.5mm, Length=7.4mm, Max Current Rating=3A, Max Voltage Rating (DC)=250V, Mount="Through Hole", Number of Contacts=2, Number of Positions=2, Number of Rows=1, Orientation=Straight, Packaging=Bulk, Pitch=2.5mm, REACH SVHC="No SVHC", Series=XH, Termination=Solder, Voltage Rating=250V, Voltage Rating (AC)=250V, Wire/Cable Gauge=22AWG
J5 J6 J8 J9: library part CMP-1502-03324-2, Current Rating=16A, Max Operating Temperature=120°C, Min Operating Temperature=-30°C, Voltage Rating=300V, Contact Material="Nickel, Tin", Height=11.6mm, Lead Pitch=5mm, NexarPartId=78871135, Number of Contacts=2, Number of Pins=2, Number of Rows=1, Packaging=Box, RoHS=Non-Compliant
"J7_Motor Controller 1" "J7_Motor Controller 2" J7_Steering: "TERM BLK 2P SIDE ENT 2.54MM PCB", Color=Green, Current=10A, Manufacturer="TE Connectivity AMP Connectors", Supplier Part Number 1=A98333-ND, Voltage=150V, ComponentLink1Description=Datasheet, ComponentLink1URL=https://www.te.com/commerce/DocumentDelivery/DDEController?Action=srchrtrv&DocNm=282834&DocType=Customer+Drawing&DocLang=English, ComponentLink2Description="DigiKey Link", ComponentLink2URL=http://digikey.com/product-detail/en/te-connectivity-amp-connectors/282834-2/A98333-ND/1150135, LastUpdated="2020-01-15 4:15:38 AM", Lifecycle Status=Active, Mating Orientation="Horizontal with Board", Minimum Order=1, Mounting Type="Through Hole", Number of Levels=1, Packaging=Bulk, Part Number=282834-2, Part Status=Active, Pitch="0.100\" (2.54mm)", Positions Per Level=2, Price=0.88, Series=Buchanan, Supplier 1=DigiKey, Wire Gauge="16-30 AWG", Wire Termination="Screw - Rising Cage Clamp"
J10: library part CMP-0411-00002-1, "USB, MINI, SMD, RA KME04-USBMU03A01", Manufacturer=Molex, ComponentLink1Description="Manufacturer URL", ComponentLink1URL=http://www.molex.com/, ComponentLink2Description=Datasheet, ComponentLink2URL=http://www.molex.com/pdm_docs/sd/675031020_sd.pdf, DatasheetVersion="Rev F, 06/2009", Mounting Technology="Surface Mount", PackageDescription="Mini USB Connector, SMT, Righer Angle", PackageReference=67503-1020, PartNumber=67503-1020, Terminal Pitch="0.8 mm"
P1 P2 P3: library part CMP-1502-01068-2, Color=Black, Contact Resistance=20mΩ, Current Rating=3A, Max Operating Temperature=105°C, Min Operating Temperature=-40°C, Operating Supply Voltage=250V, Connector Type="Male Pin", Contact Material=Copper, Contact Mating Length=5.9944mm, Contact Plating=Gold, Gender=Male, Height=8.89mm, Lead Free="Lead Free", Lead Pitch=2.54mm, Mount="Through Hole", NexarPartId=32855526, Number of Contacts=5, Number of Pins=5, Number of Positions=5, Number of Rows=1, Orientation=Vertical, Packaging=Bulk, Pitch=2.54mm, REACH SVHC=Unknown, RoHS=Compliant, Termination=Solder, Voltage Rating=250V
P4: library part CMP-1502-01064-1, "THT Vertical Pin Header WR-PHD, Pitch 2.54 mm, Single Row, 4 pins", Contact Resistance=20mOhm, Manufacturer="Wurth Elektronik", Operating Temperature=-40to105degC, Rated Current=3A, Withstanding Voltage=500VAC, Working Voltage=250VAC, Datasheet URL=https://katalog.we-online.de/em/datasheet/6130xx11121.pdf, Gender=Male, Manufacturer URL=http://www.we-online.de, Mounting Technology=THT, Orientation=Vertical, Package Reference=61300411121, Packaging=Bag, Part Number=61300411121, Pin Number=4, Pitch=2.54mm, Publisher=WurthElektronik, Row Number=Single
R1 R2 R3 R4: library part CMP-26527-000011-1, "RES 0 OHM JUMPER 1/10W 0603", Manufacturer=Stackpole, Package=RMCF0603, Power Rating=0.1W, Resistance=0mΩ, Temperature="-55°C to +155°C", Temperature Range High=+155°C, Temperature Range Low=-55°C, Voltage Rating=75V, Automotive=Yes, Automotive Grade="Grade 0", Category=Res, ComponentLink2Description=Datasheet, ComponentLink2URL=https://www.seielect.com/catalog/sei-rmcf_rmcp.pdf, Composition="Thick Film", Device Class L1="Passive Components", Device Class L2=Resistors, Device Class L3="Chip SMD Resistors", Digikey Description="RES 0 OHM JUMPER 1/10W 0603", Height=0.55mm, Ipc Land Pattern Name=RESC15580X45, Lead Free=Yes, Manufacturer Part Number=RMCF0603ZT0R00, Octopart=https://octopart.com/rmcf0603zt0r00-stackpole+electronics-19213618, RoHS=TRUE, Series=RMCF
R18 R21_Designator1 R21_Designator2 R21_Designator3 R21_Designator4 R21_Designator5 R21_Designator6 R21_Designator7 R21_Designator8 R21_Designator9: library part RNCS0603BKE100K, "RES 100K OHM 0.1% 1/16W 0603", Device Package="0603 (1608 Metric)", Manufacturer="Stackpole Electronics Inc", Operating Temperature="-55°C ~ 155°C", Power (Watts)="0.063W, 1/16W", Ratings=AEC-Q200, Supplier Device Package=0603, Supplier Part Number 1=RNCS0603BKE100KCT-ND, Temperature Coefficient=±25ppm/°C, Tolerance=±0.1%, ComponentLink1Description=Datasheet, ComponentLink1URL=https://www.seielect.com/catalog/sei-rncs_rnch.pdf, ComponentLink2Description="DigiKey Link", ComponentLink2URL=https://www.digikey.com/en/products/detail/stackpole-electronics-inc/RNCS0603BKE100K/1708835, Composition="Thin Film", Features="Anti-Corrosive, Automotive AEC-Q200, Moisture Resistant", Height - Seated (Max)="0.022\" (0.55mm)", Lifecycle Status=Active, Minimum Order=1, Number of Terminations=2, Package / Case="0603 (1608 Metric)", Packaging=TapeAndReel, Part Number=RNCS0603BKE100K, Part Status=Active, partid=4849, Price=0.07, Resistance="100 kOhms", Series=RNCS, Size / Dimension="0.061\" L x 0.031\" W (1.55mm x 0.80mm)", Supplier 1=DigiKey
  R18: LastUpdated="2023-06-08 7:45:17 PM"
  R21_Designator1 R21_Designator2 R21_Designator3 R21_Designator4 R21_Designator5 R21_Designator6 R21_Designator7 R21_Designator8 R21_Designator9: LastUpdated="2023-06-04 7:36:27 PM"
R22_Designator1 R22_Designator2 R22_Designator3 R22_Designator4 R22_Designator5 R22_Designator6 R22_Designator7 R22_Designator8 R22_Designator9: library part RNCS0603BKE10K0, "RES 10K OHM 0.1% 1/16W 0603", Device Package="0603 (1608 Metric)", Manufacturer="Stackpole Electronics Inc", Operating Temperature="-55°C ~ 155°C", Power (Watts)="0.063W, 1/16W", Ratings=AEC-Q200, Supplier Device Package=0603, Supplier Part Number 1=RNCS0603BKE10K0CT-ND, Temperature Coefficient=±25ppm/°C, Tolerance=±0.1%, ComponentLink1Description=Datasheet, ComponentLink1URL=https://www.seielect.com/catalog/sei-rncs_rnch.pdf, ComponentLink2Description="DigiKey Link", ComponentLink2URL=https://www.digikey.com/en/products/detail/stackpole-electronics-inc/RNCS0603BKE10K0/1708836, Composition="Thin Film", Features="Anti-Corrosive, Automotive AEC-Q200, Moisture Resistant", Height - Seated (Max)="0.022\" (0.55mm)", LastUpdated="2023-06-04 7:36:27 PM", Lifecycle Status=Active, Minimum Order=1, Number of Terminations=2, Package / Case="0603 (1608 Metric)", Packaging=TapeAndReel, Part Number=RNCS0603BKE10K0, Part Status=Active, partid=4838, Price=0.07, Resistance="10 kOhms", Series=RNCS, Size / Dimension="0.061\" L x 0.031\" W (1.55mm x 0.80mm)", Supplier 1=DigiKey
R31_Designator1 R31_Designator2 R31_Designator3 R31_Designator4 R31_Designator5 R31_Designator6: library part CMP-26527-003138-1, "150kΩ ±1% 0.1W 0603 Thick Film Chip Resistor AEC-Q200 compliant", Case Code (Imperial)=0603, Case Code (Metric)=1608, Max Operating Temperature=155°C, Max Power Dissipation=100mW, Min Operating Temperature=-55°C, Resistance=150kR, Resistor Type="Thick Film", Temperature Coefficient=100ppm/°C, Tolerance=1%, Case/Package=0603, Construction=Rectangular, Contact Plating=Tin, Depth=0.8mm, Features="Automotive AEC-Q200", Height=0.022inch, Lead Free="Lead Free", Length=0.061inch, Military Standard=Not, Mount="Surface Mount", Number of Terminations=2, Packaging="Tape and Reel", Power Rating=100mW, Radiation Hardening=No, RoHS Compliant=Yes, Series=RMCF, Size Code=0603, Width=0.031inch
R34 R36 R48 R50: library part CMP-00030-39746512-1, "AC01000005000JA100 Res Wirewound 500 Ohm 5% 1W 100ppm/°C to 180ppm/°C Conformal AXL Thru-Hole Ammo Pack", Case/Package=Axial, Max Operating Temperature=275°C, Max Power Dissipation=1W, Min Operating Temperature=-40°C, Resistance=500Ω, Temperature Coefficient=180ppm/°C, Tolerance=5%, Voltage Rating=22V, Composition=Wirewound, Contact Plating=Tin, Diameter=4.3mm, Features="Flame Retardant Coating", Lead Diameter=800µm, Length=11mm, NexarPartId=39746512, Number of Pins=2, Number of Terminations=2, Packaging="Tape & Box (TB)", Power Rating=1W, Radiation Hardening=No, REACH SVHC=Unknown, RoHS=Compliant, Schedule B="8533210080, 8533210080", Termination=Axial, Voltage Rating (DC)=22V, Weight=519.986953mg
R35 R37 R38 R39 R40 R41 R42 R43 R44 R45 R46 R47 R49 R51 R52 R53 R54 R55 R56 R57 R58 "R59_Motor Controller 1" "R59_Motor Controller 2" R59_Steering "R60_Motor Controller 1" "R60_Motor Controller 2" R60_Steering "R61_Motor Controller 1" "R61_Motor Controller 2" R61_Steering "R62_Motor Controller 1" "R62_Motor Controller 2" R62_Steering "R63_Motor Controller 1" "R63_Motor Controller 2" R63_Steering "R64_Motor Controller 1" "R64_Motor Controller 2" R64_Steering "R65_Motor Controller 1" "R65_Motor Controller 2" R65_Steering "R66_Motor Controller 1" "R66_Motor Controller 2" R66_Steering "R67_Motor Controller 1" "R67_Motor Controller 2" R67_Steering "R68_Motor Controller 1" "R68_Motor Controller 2" R68_Steering: library part CMP-2100-03671-1, "Chip Resistor, 1 KOhm, +/- 1%, 125 mW, -55 to 155 degC, 0805 (2012 Metric), RoHS, Tape and Reel", Case Code (Imperial)=0805, Case Code (Metric)=2012, Manufacturer=Yageo, Max Operating Temperature=155degC, Max Power Dissipation=125mW, Min Operating Temperature=-55degC, Package Description="2-Pin Surface Mounted Device, Body 2 x 1.25 mm", Package Quantity=1, Resistance=1KOhm, Temperature Coefficient=100ppm/degreesC, Tolerance=1%, Voltage Rating=150V, Case/Package=0805, Composition=ThickFilm, Datasheet URL=http://www.yageo.com/NewPortal/yageodocoutput?fileName=/pdf/R-Chip/PYu-RC_Group_51_RoHS_L_5.pdf, Datasheet Version="Rev. 5, 10/2016", Depth=1.25mm, Height=0.024inch, Lead Free=LeadFree, Length=0.079inch, Manufacturer URL=http://www.yageo.com/, Military Standard=Not, Number of Pins=2, Number of Terminations=2, Package Reference=0805, Packaging=TapeandReel, Power Rating=125mW, REACH SVHC=Unknown, RoHSCompliant=true, Termination=SMD/SMT, Voltage Rating (DC)=150V, Width=0.049inch
STLINK-HEADER-1: library part CMP-03369-000006-1, "CONN HEADER VERT 10POS 2.54MM", Current Rating=5A, Manufacturer="TE Connectivity", Temperature="-65°C to +105°C", Temperature Range High=+105°C, Temperature Range Low=-65°C, Automotive=No, Category=Conn, ComponentLink2Description=Datasheet, ComponentLink2URL=https://www.te.com/commerce/DocumentDelivery/DDEController?Action=showdoc&DocId=Customer+Drawing%7F826629%7FAC%7Fpdf%7FEnglish%7FENG_CD_826629_AC.pdf%7F826925-5, Conn Gender=Male, Conn Orientation=Vertical, Contact Material=Tin,Nickel, Device Class L1=Connectors, Device Class L2="Headers and Wire Housings", Device Class L3=unset, Digikey Description="CONN HEADER VERT 10POS 2.54MM", Height=9.9mm, Lead Free=Yes, Manufacturer Part Number=826925-5, Mouser Description="Headers & Wire Housings 2X05 POS VERT TIN", Number of Contacts=10, Number of Rows=2, Octopart=https://octopart.com/826925-5-te+connectivity-41836231, Package=826925-5, Pitch=2.54mm, RoHS=TRUE, Standoff Height=0.3mm
SW1: library part CMP-2000-07511-1, "FSMSM Push Button Switch, 50 mA, -35 to 85 degC, 2-Pin SMD, RoHS, Bulk", Case\/Package=SMD/SMT, Contact Current Rating=50mA, Contact Resistance=100mOhm, Manufacturer="TE Connectivity", Max Operating Temperature=85degC, Max Voltage Rating (DC)=12V, Min Operating Temperature=-35degC, Operating Force=180gf, Package Description="2-Pin Surface Mount Device, Body 6 x 3.5 mm, Pitch 9.19 mm", Package Quantity=1000, Voltage Rating (DC)=24V, Actuator Length=1.07mm, Actuator Material=Polyamide, Contact Material=Brass, Contact Plating=Silver, Current Rating=50mA, Datasheet URL=http://www.te.com/commerce/DocumentDelivery/DDEController?Action=showdoc&DocId=Customer+Drawing%7F1437566-3%7FC2%7Fpdf%7FEnglish%7FENG_CD_1437566-3_C2_1437566_3_1_c.dwg.pdf%7F1437566-3, Datasheet Version="Rev. C2, 08/2014", Electrical Life=20000Cycles, ELV=Compliant, Illumination Type=Illuminated, Lead Free=LeadFree, Manufacturer URL=http://www.te.com/, Mechanical Life=20000Cycles, Mount=SurfaceMount, Mounting Technology=SurfaceMount, Orientation=Straight, Package Reference=FSMSM, Packaging=LoosePiece, REACH SVHC=Unknown, RoHSCompliant=true, Switch Travel=0.25mm, Termination=GullWing, Throw Configuration=SPST
U1: library part CMP-12105-000075-1, "IC MCU 32BIT 512KB FLASH 100LQFP", Ambient Temperature Range High=+85°C, Ambient Temperature Range Low=-40°C, Frequency=180MHz, Manufacturer=STMicroelectronics, Max Junction Temp=+125°C, Max Supply Voltage=3.6V, Min Supply Voltage=1.65V, Nominal Supply Current=1.4-86mA, Package=LQFP100-1L, Temperature="-40°C to +85°C", Automotive=No, Category=IC, ComponentLink2Description=Datasheet, ComponentLink2URL=https://www.st.com/resource/en/datasheet/stm32f446ve.pdf, Core Architecture="ARM Cortex-M4", Data Bus Width=32bits, Device Class L1="Integrated Circuits (ICs)", Device Class L2="Embedded Processors and Controllers", Device Class L3=Microcontrollers, Digikey Description="IC MCU 32BIT 512KB FLASH 100LQFP", Height=1.6mm, Interface=I2C,SPI,UART,USART,Parallel,CAN,USB,LIN,IrDA,I2S,Other, Ipc Land Pattern Name=QFP50P1600X1600X160-100, Lead Free=Yes, Manufacturer Part Number=STM32F446VET6, Memory Size=512KBytes, Memory Type=FLASH, Mouser Description="ARM Microcontrollers - MCU High-performance and DSP with FPU, ARM Cortex-M4 MCU with 512 Kbytes Flash, 180 MHz CPU, Art Accelerator, SDRAM", Number Of A/D Converters=3, Number Of Adc Channels=16, Number Of Cores=1, Number Of I2C Channels=4, Number Of I/Os=81, Number Of Spi Channels=4, Number Of Timers/Counters=14, Number Of Uart Channels=6, Number Of Usb Channels=2, Octopart=https://octopart.com/stm32f446vet6-stmicroelectronics-52642922, Ram Size=128KBytes, RoHS=TRUE, Standoff Height=0.05mm, Temperature Range High=+85°C, Temperature Range Low=-40°C
"U3_Shift Register1" "U3_Shift Register2": library part CMP-14351-000004-1, "IC SHIFT REGISTER 8BIT 16TSSOP"
U5: library part CMP-2000-07589-1, "High Performance 6-Axis MEMS MotionTracking(TM) Device, 1.71 to 3.45 V, -40 to 85 degC, 16-Pin LGA, RoHS", Manufacturer=InvenSense, Max Operating Temperature=85degC, Min Operating Temperature=-40degC, Package Description="16-Pin Land Grid Array, Body 3 x 3 mm, Pitch 0.5 mm", Package Reference=I62-16, Datasheet URL=http://www.invensense.com/wp-content/uploads/2016/10/DS-000176-ICM-20602-v1.0.pdf, Datasheet Version="Rev. 1.0, 10/2016", Manufacturer URL=http://www.invensense.com/, Mounting Technology=SurfaceMount, Output Type=I2C, RoHSCompliant=True, Sensor Type=Temperature